# Altium PCB PCB.PcbDoc
Units mil, origin at the board's own origin, x right, y up, seen from the top; angles counter-clockwise.
Board outline 2559.06 x 2098.9 mil, 2 copper layers (Top Layer, Bottom Layer), stack 61.855 mil thick; 19 components, 33 nets, 117 pads, 56 vias.
Unrouted connection lines stored in the file: 2.
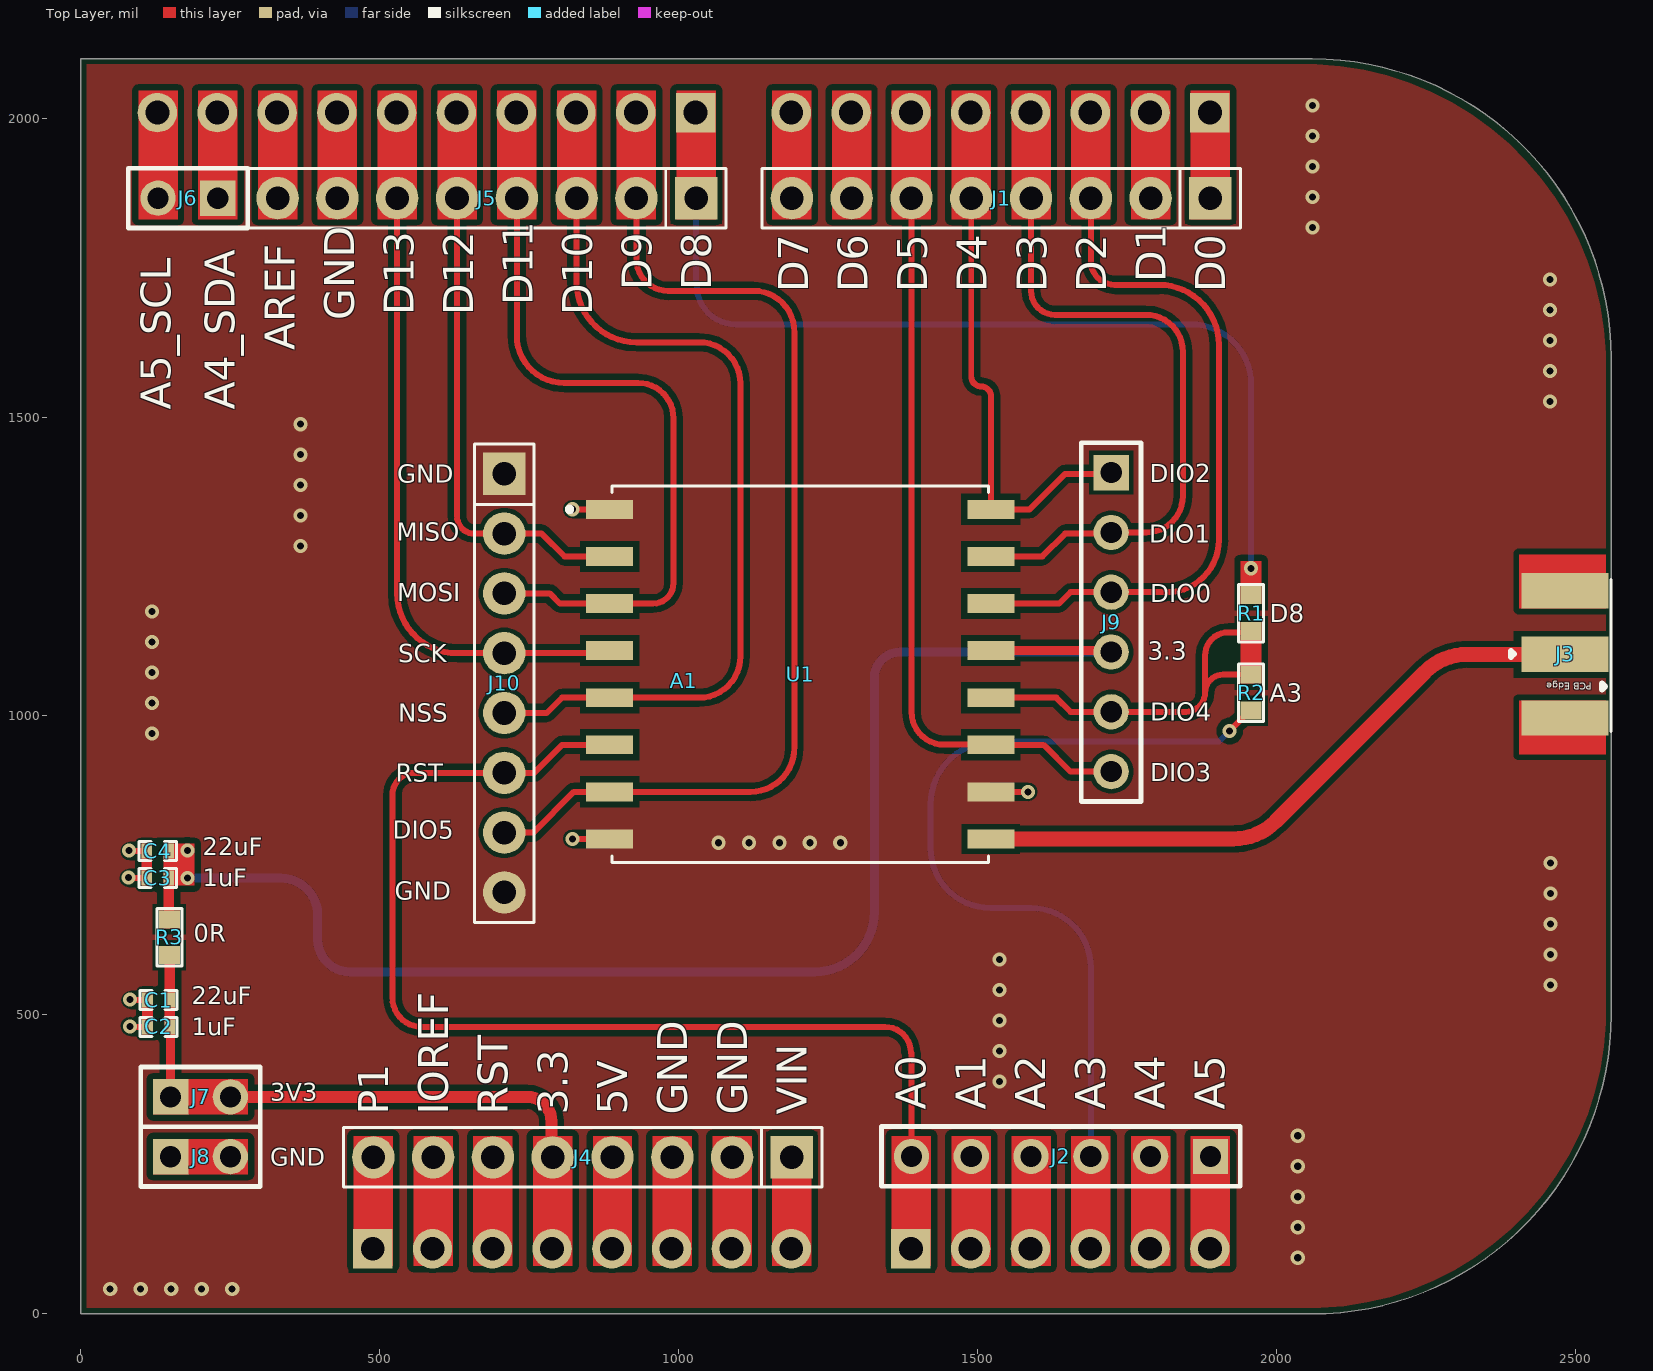
[diagram p0: Top Layer view]
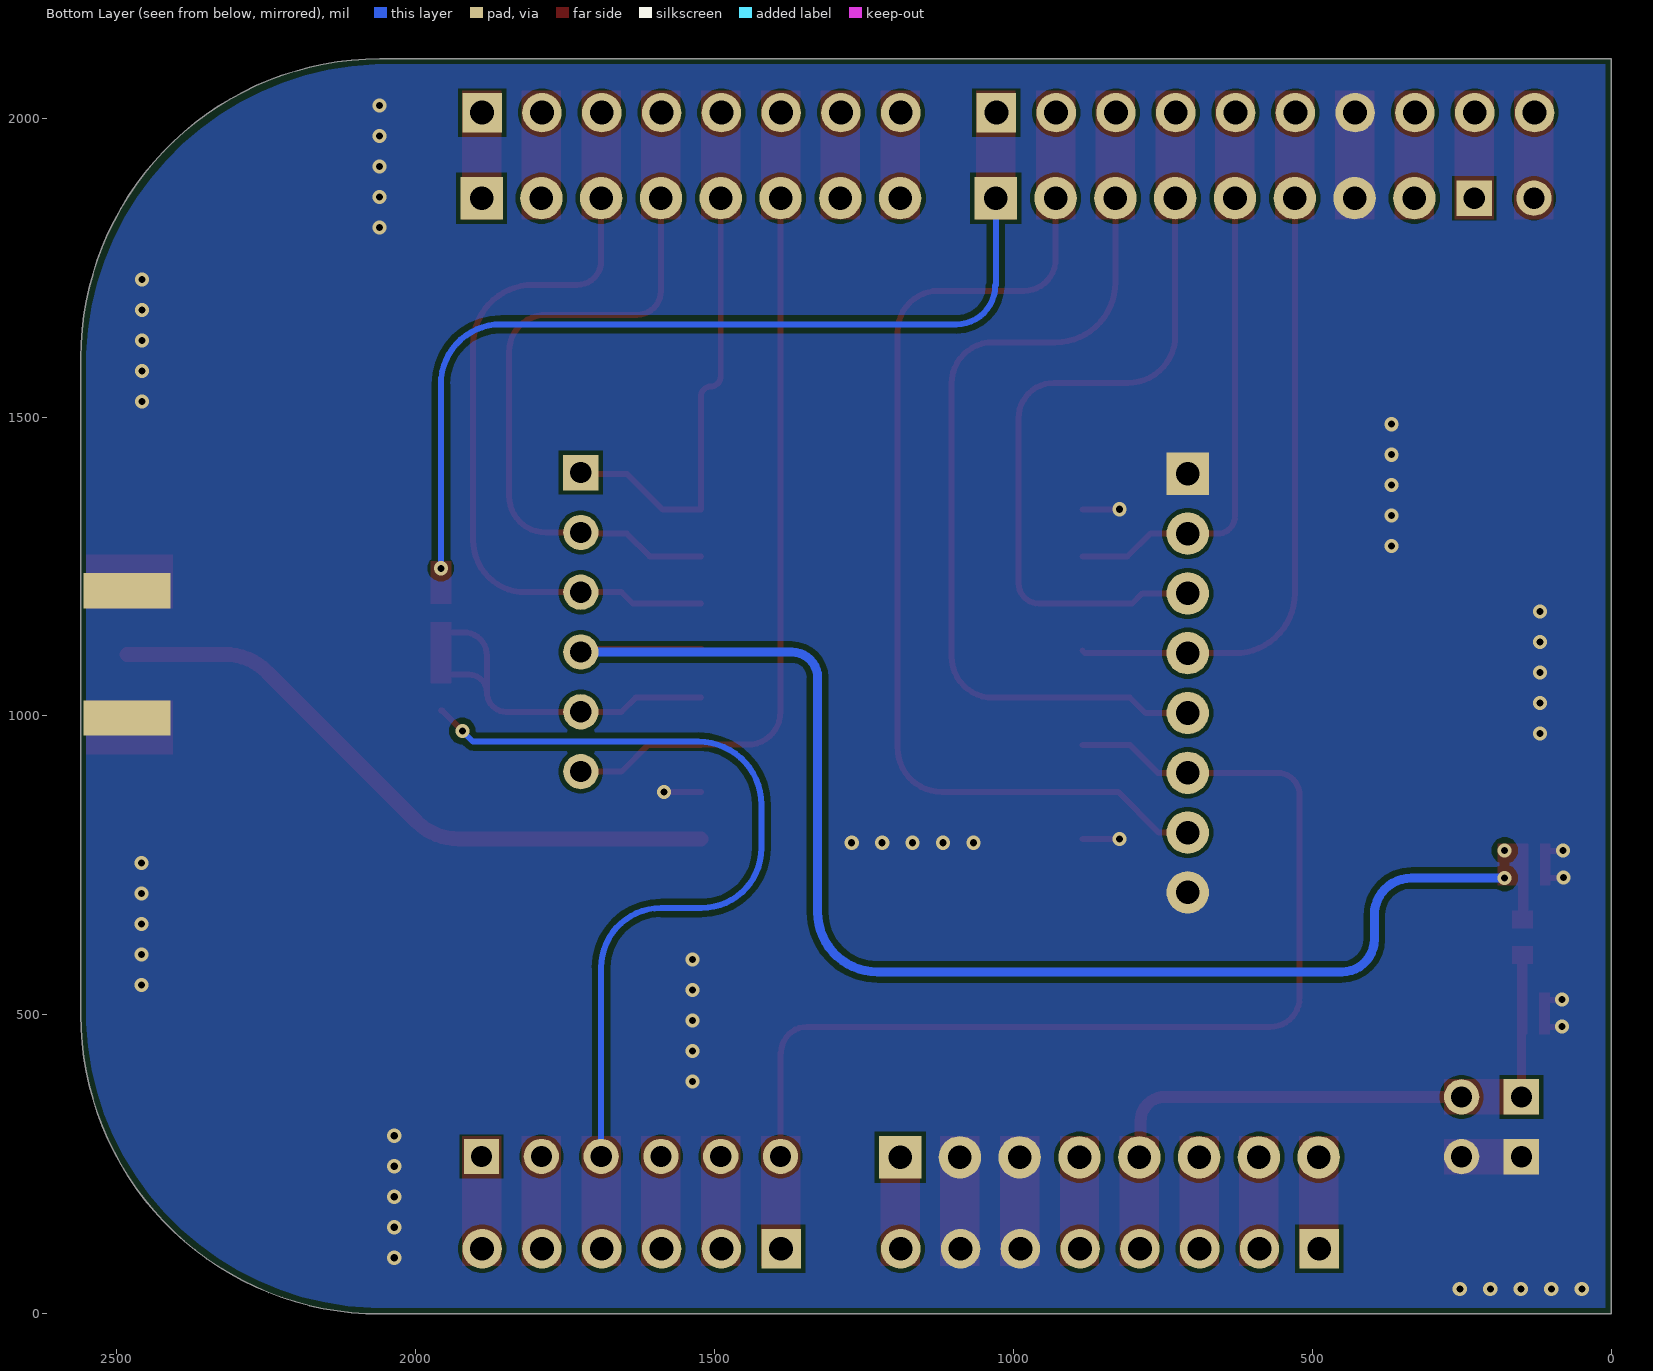
[diagram p1: Bottom Layer view, seen from below]
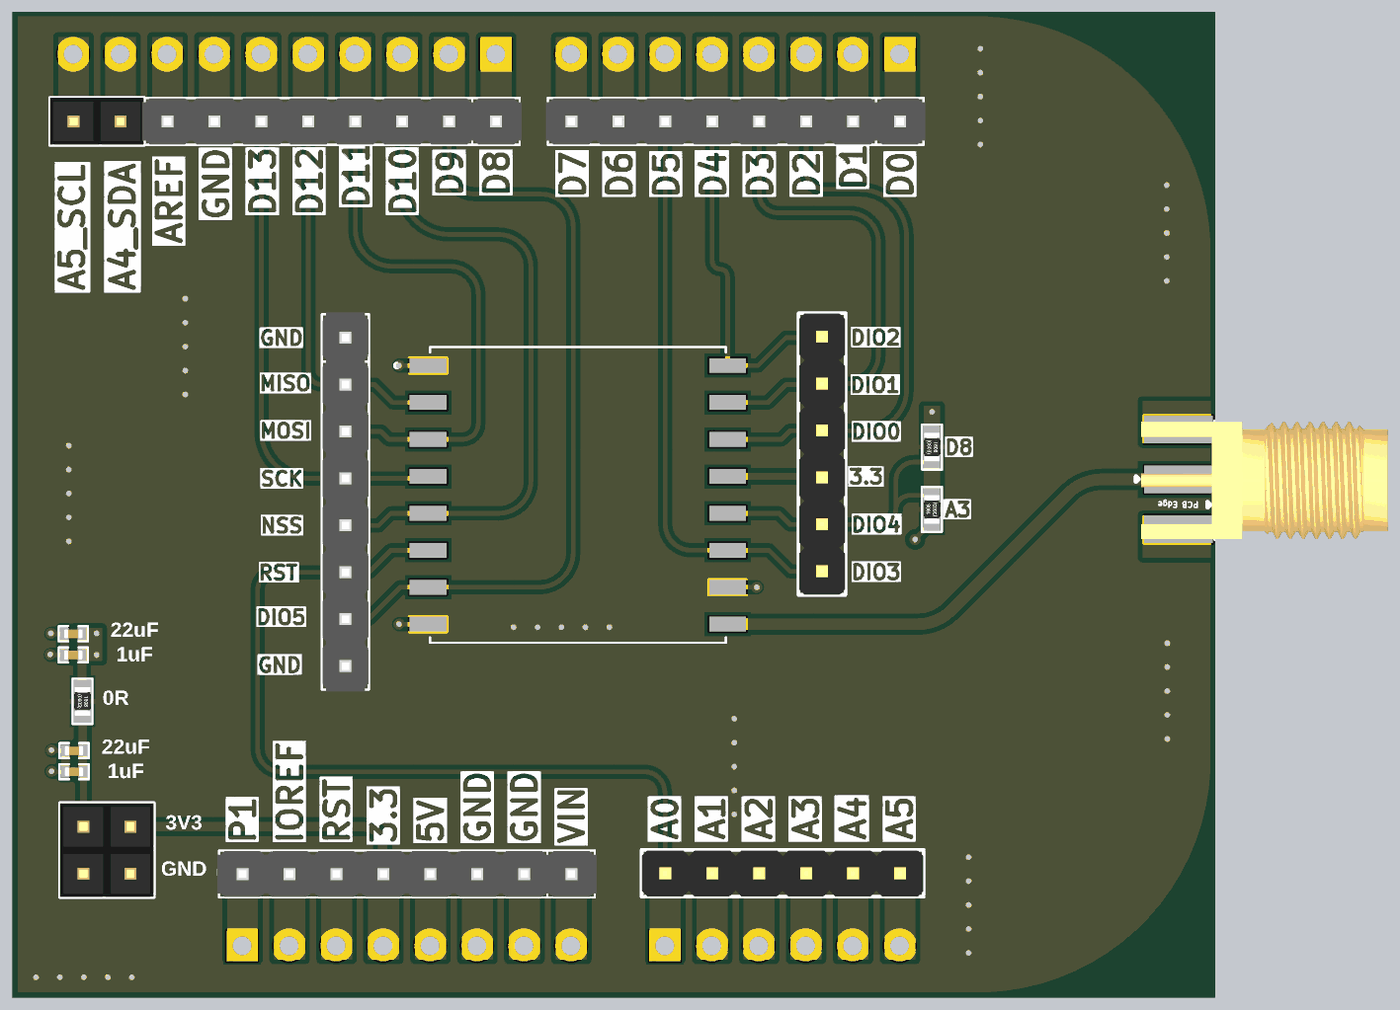
[diagram p2: 3D render of the assembled board from above, using the file's embedded part models]

## Layer stack, top to bottom
Top Solder: solder mask 0.4, Solder Resist, Dk 3.5
Top Layer: signal copper 1.4
Dielectric 1: dielectric 59.0551, FR-4, Dk 4.5
Bottom Layer: signal copper 1.4
Bottom Solder: solder mask 0.4, Solder Resist, Dk 3.5

## Board outline
0,0 0,2098.79 0.11,2098.9 2059.06,2098.9 cw(c2059.06,1598.9) 2559.06,1598.9 2559.06,500 cw(c2059.06,500) 2059.06,0

## Design rules (kind name [scope] priority, off if disabled: settings)
Clearance [All] p1: gap=10 ignorepadtopadclearanceinfootprint=FALSE except(0: SMDPad-Text THPad-Text Via-Text Fill-Text Poly-Text Region-Text Text-Text; 7: SMDPad-Via THPad-Fill THPad-Poly THPad-Region)
MaxMinImpedance "Schematic Impedance Constraint" [InNet('ANT')] p1: minimum=45.00 maximum=55.00
PolygonConnect [All] p1: connectstyle=Direct reliefconductorwidth=10 reliefentries=4 polygonreliefangle="90 Angle" airgapwidth=10
RoutingVias [All] p1: holewidth=11.81 width=23.62 viastyle="Through Hole" minholewidth=11.81 minwidth=23.62 maxholewidth=11.81 maxwidth=23.62
SolderMaskExpansion [All] p1: expansion=4 istentingtop=FALSE
SupplyNets "Schematic Supply Nets_2" [InNet('3V3')] p1: voltage=0.000
SupplyNets "Schematic Supply Nets_1" [InNet('VDD')] p2: voltage=0.000
SupplyNets "Schematic Supply Nets" [InNet('GND')] p3: voltage=0.000
UnRoutedNet [All] p1: checkbadconnections=TRUE
UnpouredPolygon [All] p1: allowunpoured=TRUE
Width [InNetClass('SC50')] p1: maxlimit=24.94 minlimit=24.94 preferedwidth=24.94 impedanceprofiledriven=TRUE impedanceprofileid={687EB5CD-476A-48F2-A53D-EE8B10B04B62} impedanceprofilevalue=50.000000 minimp=50.000000 maximp=50.000000 favimp=50.000000
28 further rules are at their usual default settings.

## Classes and differential pairs
net class SC50: ANT

## Components (designator, comment, footprint, x,y, rotation, side; value= is the part's Value field where it differs from the comment)
A1 "ARDUINO_UNO_REV3" ARDUINO_ARDUINO_UNO_REV3 737.11,1058.18 r0 top
C1 "470nF" Cap-0402 129.97,525.02 r0 top
C2 "22nF" Cap-0402 129.97,480.02 r0 top
C3 "470nF" Cap-0402 128.5,729 r0 top
C4 "22nF" Cap-0402 128.5,774 r0 top
J1 "X6511WV-08H-C60D30" "HDR 1x8 TH male" 1539,1866 r180 top
J2 "X6511WV-06H-C60D30" HDR1X6_ 1889,263.44 r180 top
J3 "SMA Jack" CON-SMA-EDGE_S 2482,1209.3 r180 top
J4 "X6511WV-08H-C60D30" "HDR 1x8 TH male" 839,262 r180 top
J5 "X6511WV-08H-C60D30" "HDR 1x8 TH male" 679,1866 r180 top
J6 "X6511WV-02H-C60D30" HDR1X2_ 229,1866 r180 top
J7 "X6511WV-02H-C60D30" HDR1X2_ 150,363 r0 top
J8 "X6511WV-02H-C60D30" HDR1X2_ 150,263 r0 top
J9 "X6511WV-06H-C60D30" HDR1X6_ 1723,1407 r270 top
J10 "X6511WV-08H-C60D30" "HDR 1x8 TH male" 708,1055 r270 top
R1 "0R" Res-0603 1957,1172 r90 top
R2 "0R" Res-0603 1957.01,1039 r270 top
R3 "0R" Res-0603 148,630 r90 top
U1 "RFM95W-868S2R" MODULE_RFM95W-868S2R 1203,1070 r0 top

## Footprints (in the part's own frame and the unit in brackets; to place one, negate y for a bottom-side part, rotate by r counter-clockwise, add the part's x,y. Pads: shape width x height; smd on the part's side, far side on the other; paste and mask are expansions set on the pad)
ARDUINO_ARDUINO_UNO_REV3 [mil]
  round 66 hole 40: 3V3(50.89,-949.18) 5V(150.89,-949.18) A1(750.89,-949.18) A2(850.89,-949.18) A3(950.89,-949.18) A4(1050.89,-949.18) A4_SDA(-509.11,950.82) A5(1150.89,-949.18) A5_SCL(-609.11,950.82) AREF(-409.11,950.82) D1(1050.89,950.82) D2(950.89,950.82) D3(850.89,950.82) D4(750.89,950.82) D5(650.89,950.82) D6(550.89,950.82) D7(450.89,950.82) D9(190.89,950.82) D10(90.89,950.82) D11(-9.11,950.82) D12(-109.11,950.82) D13(-209.11,950.82) GND_1(350.89,-949.18) GND_2(250.89,-949.18) GND_3(-309.11,950.82) IOREF(-149.11,-949.18) RST(-49.11,-949.18) VIN(450.89,-949.18)
  rect 66x66 / inner round 66 / far side rect 66x66 hole 40: A0(650.89,-949.18) D0(1150.89,950.82) D8(290.89,950.82) P1(-249.11,-949.18)
Cap-0402 [mil]
  rect 18x25 smd mask+2.36: 1(-18.5,0) 2(18.5,0)
  silkscreen extent -31,-16 31,16, body extent -20,-10 20,10, height 19
CON-SMA-EDGE_S [mm]
  rect 3.7x1.5 smd: 1(0,2.7) 2(0,0) 3(0,5.4)
  rect 3.7x1.5 smd far side: 4(0,5.4) 5(0,0)
  silkscreen extent -1.96,-0.48 2.3,5.97, body extent -11.32,-0.42 2.01,5.93, height 3.55
HDR1X2_ [mm] "CONN HEADER VERT 2POS 2.54MM"
  rect 1.5x1.5 hole 0.9: 1(0,0)
  round 1.5 hole 0.9: 2(2.54,0)
  silkscreen extent -1.27,-1.27 3.81,1.27, body extent -1.27,-1.27 3.81,1.27, height 8.44
HDR1X6_ [mm] "Connector; Header; 6 Position"
  rect 1.5x1.5 hole 0.9: 1(0,0)
  round 1.5 hole 0.9: 2(2.54,0) 3(5.08,0) 4(7.62,0) 5(10.16,0) 6(12.7,0)
  silkscreen extent -1.27,-1.27 13.97,1.27, body extent -1.27,-1.24 13.97,1.25, height 8.54
"HDR 1x8 TH male" [mm]
  rect 1.8x1.8 hole 1 paste-2539.97 mask+0.051: 1(-8.89,0)
  round 1.8 hole 1 paste-2539.97 mask+0.051: 2(-6.35,0) 3(-3.81,0) 4(-1.27,0) 5(1.27,0) 6(3.81,0) 7(6.35,0) 8(8.89,0)
  silkscreen extent -10.16,-1.27 10.16,1.27, body extent -10.26,-1.25 10.27,1.25, height 8.5
MODULE_RFM95W-868S2R [mm]
  rect 2x0.8 smd: 1(-8.1,7) 2(-8.1,5) 3(-8.1,3) 4(-8.1,1) 5(-8.1,-1) 6(-8.1,-3) 7(-8.1,-5) 8(-8.1,-7) 9(8.1,-7) 10(8.1,-5) 11(8.1,-3) 12(8.1,-1) 13(8.1,1) 14(8.1,3) 15(8.1,5) 16(8.1,7)
  silkscreen extent -9.9,-8 8,8
Res-0603 [mil]
  rect 30x35 smd: 1(-30,0) 2(30,0)
  silkscreen extent -48,-21 48,21, body extent -31,-17 31,17, height 18

## Part data
A1: "Microcontroller board based on the ATmega328P.", Package="Non-Standard Arduino", Check_prices=https://www.snapeda.com/parts/ARDUINO%20UNO%20REV3/Arduino/view-part/?ref=eda, MF=Arduino, MP="ARDUINO UNO REV3", SnapEDA_Link=https://www.snapeda.com/parts/ARDUINO%20UNO%20REV3/Arduino/view-part/?ref=snap
C1 C3: library part CC0402KRX5R7BB474, "CAP CER 0.47UF 16V X5R 0402", Case/Package=0402, LCSC Part Number=C527010, Manufacturer=Yageo, Max Operating Temperature=85°C, Min Operating Temperature=-55°C, Supplier Part Number 1=1070400, Tolerance=10%, Voltage Rating=16V, Capacitance=470nF, Category="Ceramic Capacitors", ComponentLink1Description=http://www.yageo.com/documents/recent/UPY-GPHC_X5R_4V-to-50V_25.pdf?src-supplier=Digi-Key, ComponentLink1URL=http://www.yageo.com/documents/recent/UPY-GPHC_X5R_4V-to-50V_25.pdf?src-supplier=Digi-Key, ComponentLink2Description=http://www.yageo.com/exep/pages/download/literatures/ProductSelectionGuide%202014_Final_2.pdf?src-supplier=Digi-Key, ComponentLink2URL=http://www.yageo.com/exep/pages/download/literatures/ProductSelectionGuide%202014_Final_2.pdf?src-supplier=Digi-Key, Halogen Free="Halogen Free", Item Type=Capacitor, Lead Free="Lead Free", Length=0.039inch, Manufacturer Part Number=CC0402KRX5R7BB474, Mount="Surface Mount", Packaging="Tape and Reel", Pricing 1="10000=0.01840, 20000=0.01800, 40000=0.01760, 50000=0.01750, 150000=0.01670 (USD)", RoHS=Yes, RoHS Compliant=Yes, Stock 1=10000, Supplier 1="Future Electronics", Thickness=0.022inch, Voltage Rating (DC)=16V, Width=0.02inch
C2 C4: library part CC0402JRX7R7BB223, "CAP CER 0.022UF 16V X7R 0402", Case Code (Imperial)=0402, Case Code (Metric)=1005, Dielectric=X7R, LCSC Part Number=C541459, Manufacturer=Yageo, Max Operating Temperature=125°C, Min Operating Temperature=-55°C, Supplier Part Number=311-3758-1-ND, Tolerance=5%, Voltage Rating=16V, Case/Package=0402, Category="Ceramic Capacitors", ComponentLink1Description=https://datasheet.ciiva.com/13264/upy-gphc-x7r-6-3v-to-50v-8-12304-13264039.pdf?src-supplier=Mouser, ComponentLink1URL=https://datasheet.ciiva.com/13264/upy-gphc-x7r-6-3v-to-50v-8-12304-13264039.pdf?src-supplier=Mouser, Halogen Free=5694HalogenFree, Item Type=Capacitor, Lead Free=5697LeadFree, Length=0.039inch, Manufacturer Part Number=CC0402JRX7R7BB223, Mounting Technology="Surface Mount", Packaging="Tape and Reel", Pricing="1=0.1, 10=0.033, 50=0.0192, 100=0.0149, 500=0.0112, 1000=0.0088, 2500=0.008, 5000=0.00736 (USD)", RoHS=Yes, RoHS Compliant=Yes, Series=CC, Stock=4203, Supplier=Digikey, Termination=SMD/SMT, Thickness=0.022inch, Voltage Rating (DC)=16V, Weight=2.3E-05oz, Width=0.5mm
J1 J4 J5 J10: "Gold 250V 3A Square Pins 2.5mm 8P 260℃ 6mm -40℃~+105℃ 3mm 2.54mm Plugin Black Brass 2.54mm 1x8P Plugin,P=2.54mm Pin Headers ROHS", LCSC Part Number=C706880, Manufacturer=XKB, Package=Plugin,P=2.54mm, ComponentLink1Description=LCSC, ComponentLink1URL=https://www.lcsc.com/product-detail/Pin-Headers_XKB-Connection-X6511WV-08H-C60D30_C706880.html, Item Type="Male Header", Manufacturer Part Number=X6511WV-08H-C60D30
J2 J9: "Gold 250V 3A Straight Square Pins 2.5mm 6P 260℃ 6mm -40℃~+105℃ 3mm 2.54mm Plugin Black Brass 1x6P Plugin,P=2.54mm Pin Headers ROHS", LCSC Part Number=C706878, Manufacturer=XKB, Package=Plugin,P=2.54mm, ComponentLink1Description=LCSC, ComponentLink1URL=https://www.lcsc.com/product-detail/Pin-Headers_XKB-Connectivity-X6511WV-06H-C60D30_C706878.html, Item Type="Male Header", Manufacturer Part Number=X6511WV-06H-C60D30
J3: library part CON-SMA-EDGE-S, "Sma Female Connector, Pcb Edge Mount Rohs Compliant: Yes", Case/Package=SMA, Manufacturer="RF Solutions", Package=THT, Supplier Part Number 1=1258191, Category="RF / Coaxial Connectors", ComponentLink1Description=https://media.digikey.com/pdf/Data%20Sheets/RF%20Solutions%20PDFs/CON-SMA-EDGE.pdf?src-supplier=Digi-Key, ComponentLink1URL=https://media.digikey.com/pdf/Data%20Sheets/RF%20Solutions%20PDFs/CON-SMA-EDGE.pdf?src-supplier=Digi-Key, Connector Type=SMA, Fastening Type=Threaded, Item Type=Connector, Manufacturer Part Number=CON-SMA-EDGE-S, Mount=Edge,Board, Number of Ports=1, Pricing 1="1=1.16, 10=0.96 (GBP)", RoHS=Yes, Series=-, Stock 1=4145, Supplier 1=Rs, Termination=Solder
J6 J7 J8: "Gold 250V 3A Straight Square Pins 2.5mm 2P 260℃ 6mm -40℃~+105℃ 3mm 2.54mm Plugin Black Brass 1x2P Plugin,P=2.54mm Pin Headers ROHS", LCSC Part Number=C706874, Manufacturer=XKB, Package=Plugin,P=2.54mm, ComponentLink1Description=LCSC, ComponentLink1URL=https://www.lcsc.com/product-detail/Pin-Headers_XKB-Connectivity-X6511WV-02H-C60D30_C706874.html, Item Type="Male Header", Manufacturer Part Number=X6511WV-02H-C60D30
R1 R2 R3: library part RC0603FR-070RL, "RES SMD 0R, 1%, 0.1W, 0603", LCSC Part Number=C100044, Manufacturer=Yageo, Package=0603, ComponentLink9Description=LCSC, ComponentLink9URL=https://www.lcsc.com/product-detail/Chip-Resistor-Surface-Mount_YAGEO-RC0603FR-070RL_C100044.html, Item Type=Resistor, Manufacturer Part Number=RC0603FR-070RL
U1: "Module: transceiver; RF; FSK,GFSK,GMSK,LoRa,MSK,OOK; 868MHz; SMD", Package=None, Check_prices=https://www.snapeda.com/parts/RFM95W-868S2R/HOPE+Microelectronics/view-part/?ref=eda, MF="Hope Microelectronics", MP=RFM95W-868S2R, SnapEDA_Link=https://www.snapeda.com/parts/RFM95W-868S2R/HOPE+Microelectronics/view-part/?ref=snap

## Via types
v1: diameter 23.62, hole 11.81, Top Layer to Bottom Layer, 56 vias

## Nets (pads, with @x,y where several pads share a name; then routed paths per layer and width w, separated by ;. In a path a pad name is that pad's centre, name@x,y a point inside that pad or via, vN(x,y) a via of type N, cw(c..) or ccw(c..) an arc to the next point about the centre after c; other vN are vias at no path point)
3V3: C3.2 C4.2 J9.4 R3.2 U1.13 | length 2328.7
  Top Layer w15: U1.13 1718.63,1109.37 J9.4@1723,1105
  Bottom Layer w15: v1(178,729) 334,729 cw(c334,667) 396,667 396,626.2 ccw(c450.2,626.2) 450.2,572 1227,572 ccw(c1227,672) 1327,672 1327,1064 cw(c1370,1064) 1370,1107 J9.4
  other v1: 178,774.98
+5V: A1.5V J4.4
A0: A1.A0 J2.6 J10.6 U1.6 | length 1836.3
  Top Layer w10: U1.6 804.83,951.89 757.94,905 J10.6 558,905 ccw(c558,868) 521,868 521,529 ccw(c570,529) 570,480 1345,480 cw(c1345,437) 1388,437 cw(c1388,436) 1389,436 J2.6
A1: A1.A1 J2.5
A2: A1.A2 J2.4
A3: A1.A3 J2.3 R2.2 | length 1388.6
  Top Layer w10: v1(1921.11,974.91) 1921.11,975.6 1954.51,1009 R2.2
  Bottom Layer w10: J2.3 1689,579 ccw(c1589,579) 1589,679 1521,679 cw(c1521,779) 1421,779 1421,851.89 cw(c1526.15,851.89) 1526.15,957.04 1903.24,957.04 v1(1921.11,974.91)
A4: A1.A4 J2.2
A4_SDA: A1.A4_SDA J6.1
A5: A1.A5 J2.1
A5_SCL: A1.A5_SCL J6.2
ANT: J3.1 U1.9 | length 1079.3
  Top Layer w24.94: U1.9 1926.99,794.41 ccw(c1926.99,894.41) 1997.7,823.7 2247.71,1073.71 cw(c2318.42,1003) 2318.42,1103 J3.1
AREF: A1.AREF J5.8
D0: A1.D0 J1.1
D1: A1.D1 J1.2
D2: A1.D2 J1.3 J9.3 U1.14 | length 1164.5
  Top Layer w10: U1.14 1636.11,1188.11 1655,1207 J9.3 1816,1207 ccw(c1816,1294) 1903,1294 1903,1621 ccw(c1803,1621) 1803,1721 1729,1721 cw(c1729,1761) 1689,1761 J1.3
D3: A1.D3 J1.4 J9.2 U1.15 | length 1079.9
  Top Layer w10: U1.15 1607.85,1266.85 1646,1305 J9.2@1723,1305 ; J1.4 1589,1711 ccw(c1629,1711) 1629,1671 1781,1671 cw(c1781,1609) 1843,1609 1843,1368 cw(c1782,1368) 1782,1307 J9.2
D4: A1.D4 J1.5 J9.1 U1.16 | length 764.9
  Top Layer w10: J1.5 1489,1568 ccw(c1506,1568) 1506,1551 cw(c1506,1535.1) 1521.9,1535.1 U1.16 1586.59,1345.59 1646,1405 J9.1@1723,1405
D5: A1.D5 J1.6 J9.6 U1.11 | length 1243.1
  Top Layer w10: J1.6 1389,1007 ccw(c1444,1007) 1444,952 1521.9,952 U1.11 1610.11,951.89 1655,907 J9.6
D6: A1.D6 J1.7
D7: A1.D7 J1.8
D8: A1.D8 J5.1 R1.2 | length 1475.8
  Bottom Layer w10: J5.1 1029,1721 ccw(c1030,1721) 1030,1720 ccw(c1095,1720) 1095,1655 1857,1655 cw(c1857,1555) 1957,1555 v1(1957,1247)
D9: A1.D9 J5.2 J10.7 U1.7 | length 1686.8
  Top Layer w10: J10.7 756.23,805 824.38,873.15 U1.7 1120,873.15 ccw(c1120,946.15) 1193,946.15 1193,1643 ccw(c1125,1643) 1125,1711 982,1711 cw(c982,1764) 929,1764 J5.2
D10: A1.D10 J5.3 J10.5 U1.5 | length 1412.8
  Top Layer w10: J10.5 779,1005 804.63,1030.63 U1.5 1034,1030.63 ccw(c1034,1099.63) 1103,1099.63 1103,1556 ccw(c1034,1556) 1034,1625 929,1625 cw(c929,1725) 829,1725 J5.3
D11: A1.D11 J5.4 J10.3 U1.3 | length 1156.1
  Top Layer w10: J10.3 784,1205 800.89,1188.11 U1.3 957,1188.11 ccw(c957,1222.11) 991,1222.11 991,1498 ccw(c932,1498) 932,1557 808,1557 cw(c808,1636) 729,1636 J5.4
D12: A1.D12 J5.5 J10.2 U1.2 | length 819.5
  Top Layer w10: J5.5 629,1334 ccw(c658,1334) 658,1305 J10.2 770.6,1305 808.75,1266.85 U1.2
D13: A1.D13 J5.6 J10.4 U1.4 | length 1075
  Top Layer w10: J5.6 529,1205 ccw(c629,1205) 629,1105 J10.4 879.73,1105 U1.4
DIO4: J9.5 R1.1 R2.1 U1.12 | length 642.7
  Top Layer w10: U1.12 1631.37,1030.63 1655,1007 J9.5 1848,1007 ccw(c1848,1039) 1880,1039 ; R2.1 1910,1069 ccw(c1910,1039) 1880,1039 ; R1.1 cw(c1955,1142) 1955,1140 1919,1140 ccw(c1919,1101) 1880,1101 1880,1039
GND: A1.GND_1 A1.GND_2 A1.GND_3 C1.1 C2.1 C3.1 C4.1 J3.2 J3.3 J3.4 J3.5 J4.2 J4.3 J5.7 J8.1 J8.2 J10.1 J10.8 U1.1 U1.8 U1.10 | length 302
  Top Layer w10: v1@80.34,729.01 C3.1@108.82,729.01 ; v1@81.51,774 C4.1 ; v1(82,481) ccw(c82.98,481) 82.98,480.02 C2.1 ; v1@82.98,525.02 C1.1 ; v1@822,794.41 U1.8 ; v1@822,1345.59 U1.1 ; U1.10 1584,873.15 v1(1584,873)
  other v1: 49,42 100,42 151,42 202,42 253,42 2035,94 2035,145 2035,196 2035,247 2035,298 1536,389 1536,440 1536,491 82,526 1536,542 2458,550 1536,593 2458,601 2458,652 2458,703 79.35,729.99 2458,754 80.53,774.98 1066,788 1117,788 1168,788 1219,788 1270,788 822,794.56 119,971 119,1022 119,1073 119,1124 119,1175 367,1284 367,1335 822,1345.74 367,1386 367,1437 367,1488 2457,1526 2457,1577 2457,1628 2457,1679 2457,1730 2060,1816.79 2060,1867.79 2060,1918.79 2060,1969.79 2060,2020.79
IOREF: A1.IOREF J4.7
P1: A1.P1 J4.8
RST: A1.RST J4.6
VDD: A1.3V3 C1.2 C2.2 J4.5 J7.1 J7.2 R3.1 | length 737
  Top Layer w15: J7.1 C2.2@150,478.49
  Top Layer w20: J7.2 746,363 cw(c746,322) 787,322 787,264 ccw(c789,264) J4.5
VIN: A1.VIN J4.1

## Polygon pours and split planes (outlines as drawn)
GND on Bottom Layer "NONET_L-01_P-001" (solid, pour order 0): 2047,2090 cw(c2047,1587) 2550,1587 2550,506 cw(c2054,506) 2054,10 10,10 10,2090
GND on Top Layer "NONET_L-01_P-001" (solid, pour order 2): 2047,2090 cw(c2047,1587) 2550,1587 2550,506 cw(c2054,506) 2054,10 10,10 10,2090

## Other copper
Top Layer:
  rectangle net D13: 496,1830.57 562,2046
  rectangle net D3: 1556,1830.57 1622,2046
  rectangle net A0: 1356,80 1422,297.43
  rectangle net D8: 996,1830.57 1062,2046
  rectangle net D8: 1939.5,1187 1974.5,1259.54
  rectangle net D12: 596,1830.57 662,2046
  rectangle net D2: 1656,1830.57 1722,2046
  rectangle net DIO4: 1939.5,1054 1974.51,1157
  rectangle net A1: 1456,80 1522,297.43
  rectangle net A2: 1556,80 1622,297.43
  rectangle net A4: 1756,80 1822,297.43
  rectangle net D0: 1856,1830.57 1922,2046
  rectangle net D7: 1156,1830.57 1222,2046
  rectangle net A5: 1856,80 1922,297.43
  rectangle net A3: 1656,80 1722,297.43
  rectangle net P1: 456,80 522,297.43
  rectangle net GND: 2405.23,936 2550.9,1026.23
  rectangle net GND: 2405.23,1179.77 2550.9,1270
  rectangle net 3V3: 138,716.5 190,786.5
  rectangle net A5_SCL: 96,1830.57 162,2046
  rectangle net A4_SDA: 196,1830.57 262,2046
  rectangle net AREF: 296,1830.57 362,2046
  rectangle net GND: 396,1830.57 462,2046
  rectangle net D11: 696,1830.57 762,2046
  rectangle net D10: 796,1830.57 862,2046
  rectangle net D9: 896,1830.57 962,2046
  rectangle net D6: 1256,1830.57 1322,2046
  rectangle net D5: 1356,1830.57 1422,2046
  rectangle net D4: 1456,1830.57 1522,2046
  rectangle net D1: 1756,1830.57 1822,2046
  rectangle net VIN: 1156,80 1222,297.43
  rectangle net GND: 1056,80 1122,297.43
  rectangle net GND: 956,80 1022,297.43
  rectangle net +5V: 856,80 922,297.43
  rectangle net VDD: 756,80 822,297.43
  rectangle net RST: 656,80 722,297.43
  rectangle net IOREF: 556,80 622,297.43
  rectangle net GND: 102.47,467.52 120.47,537.52
  rectangle net GND: 101,716.5 119,786.5
  rectangle net 3V3: 130.5,645 165.5,675
  rectangle net 3V3: 138,660 156,786.5
  rectangle net VDD: 130.5,585 165.5,615
  rectangle net VDD: 139.47,467.52 157.47,600
  rectangle net GND: 120.47,233.47 279.53,292.53
  rectangle net VDD: 120.47,333.47 279.53,392.53

## Silkscreen, mask and mechanical layers (free items; w line width, h text height)
Top Overlay:
  text "D1" at 1814.32,1725.36 h50 r90
  text "D9" at 954.45,1711.7 h50 r90
  text "D8" at 1053.99,1711.7 h50 r90
  text "D7" at 1216.31,1708.7 h50 r90
  text "D6" at 1315.98,1708.7 h50 r90
  text "D5" at 1415.64,1708.7 h50 r90
  text "D4" at 1515.31,1708.7 h50 r90
  text "D3" at 1614.98,1708.7 h50 r90
  text "D2" at 1714.65,1708.7 h50 r90
  text "D0" at 1913.99,1708.7 h50 r90
  text "D11" at 755.38,1686.71 h50 r90
  text "D13" at 556.31,1670.05 h50 r90
  text "D12" at 655.84,1670.05 h50 r90
  text "D10" at 854.92,1670.05 h50 r90
  text "GND" at 456.77,1661.72 h50 r90
  text "AREF" at 357.23,1611.73 h50 r90
  text "A5_SCL" at 149.83,1511.77 h50 r90
  text "A4_SDA" at 257.7,1511.77 h50 r90
  text "DIO2" at 1787.51,1390.69 h30
  text "GND" at 529.01,1390 h30
  text "MISO" at 528.52,1293 h30
  text "DIO1" at 1786.6,1289.53 h30
  text "MOSI" at 529.45,1192.08 h30
  text "DIO0" at 1788.51,1190 h30
  text "D8" at 1988.01,1157 h30
  text "3.3" at 1784.2,1094.38 h30
  text "SCK" at 531.01,1090 h30
  text "A3" at 1988.01,1024.01 h30
  text "DIO4" at 1788.51,992 h30
  text "NSS" at 531.01,990 h30
  text "DIO3" at 1788.51,891 h30
  text "RST" at 526.41,889.94 h30
  text "DIO5" at 521.58,794.85 h30
  text "22uF" at 204,756.99 h50
  text "1uF" at 204,705 h50
  text "GND" at 524.87,692.86 h30
  text "0R" at 189,612 h50
  text "22uF" at 185.34,508.02 h50
  text "1uF" at 185.34,456.02 h50
  text "3V3" at 316.55,346.41 h50
  text "A0" at 1412.99,341.35 h50 r90
  text "A1" at 1512.99,341.35 h50 r90
  text "A2" at 1612.99,341.35 h50 r90
  text "A3" at 1712.99,341.35 h50 r90
  text "A4" at 1812.99,341.35 h50 r90
  text "A5" at 1912.99,341.35 h50 r90
  text "P1" at 513.99,333.35 h50 r90
  text "IOREF" at 613.99,333.36 h50 r90
  text "RST" at 713.99,333.36 h50 r90
  text "3.3" at 813.99,333.36 h50 r90
  text "5V" at 913.99,333.35 h50 r90
  text "GND" at 1013.99,333.35 h50 r90
  text "GND" at 1113.99,333.36 h50 r90
  text "VIN" at 1213.99,333.36 h50 r90
  text "GND" at 316.55,238 h50
Board Outline:
  the board outline again, w10
Fabrication:
  drawing of 191 lines, arcs and shapes, not listed
  text "Layer" at 95.34,3079 h60
  text "Name" at 505.26,3079 h60
  text "Material" at 1435,3079 h60
  text "Thickness" at 2294.77,3079 h60
  text "Constant" at 2944.6,3079 h60
  text "Board Layer Stack" at 3514.46,3079 h60
  text "Top Overlay" at 505.26,2959 h60
  text "Top Solder" at 505.26,2839 h60
  text "Solder Resist" at 1435,2839 h60
  text "0.40mil" at 2294.77,2839 h60
  text "3.5" at 2944.6,2839 h60
  text "1" at 95.34,2719 h60
  text "Top Layer" at 505.26,2719 h60
  text "1.40mil" at 2294.77,2719 h60
  text "Dielectric 1" at 505.26,2599 h60
  text "FR-4" at 1435,2599 h60
  text "59.06mil" at 2294.77,2599 h60
  text "4.5" at 2944.6,2599 h60
  text "2" at 95.34,2479 h60
  text "Bottom Layer" at 505.26,2479 h60
  text "1.40mil" at 2294.77,2479 h60
  text "Bottom Solder" at 505.26,2359 h60
  text "Solder Resist" at 1435,2359 h60
  text "0.40mil" at 2294.77,2359 h60
  text "3.5" at 2944.6,2359 h60
  text "Bottom Overlay" at 505.26,2239 h60
Drill Drawing:
  circle w10: c3256.62,1251.83 r33.33
  lines w10: 3223.29,985.17 3289.96,985.17 3256.62,918.5 3223.29,985.17 ; 3223.29,1068.5 3289.96,1068.5 3289.96,1135.17 3223.29,1135.17 3223.29,1068.5 ; 3223.29,1368.5 3256.62,1385.17 3289.96,1368.5 3273.29,1401.83 3289.96,1435.17 3256.62,1418.5 3223.29,1435.17 3239.96,1401.83 3223.29,1368.5
  lines w15: 3163.5,873.5 10173.6,873.5 ; 3163.5,1473.5 10173.6,1473.5 ; 3714.38,723.5 3714.38,1623.5 ; 4304.22,723.5 4304.22,1623.5 ; 5403.9,723.5 5403.9,1623.5 ; 5909.78,723.5 5909.78,1623.5 ; 6643.58,723.5 6643.58,1623.5 ; 8143.13,723.5 8143.13,1623.5 ; 8732.98,723.5 8732.98,1623.5 ; 9478.78,723.5 9478.78,1623.5 ; 3163.5,723.5 10173.6,723.5 10173.6,1623.5 3163.5,1623.5 3163.5,723.5
  text "Symbol" at 3253.5,1518.5 h72
  text "Count" at 3759.38,1518.5 h72
  text "Hole Size" at 4349.22,1518.5 h72
  text "Plated" at 5448.9,1518.5 h72
  text "Hole Type" at 5954.78,1518.5 h72
  text "Drill Layer Pair" at 6688.58,1518.5 h72
  text "Via/Pad" at 8188.13,1518.5 h72
  text "Pad Shape" at 8777.98,1518.5 h72
  text "Template" at 9523.78,1518.5 h72
  text "56" at 3759.38,1368.5 h60
  text "11.81mil (0.300mm)" at 4349.22,1368.5 h60
  text "PTH" at 5448.9,1368.5 h60
  text "Round" at 5954.78,1368.5 h60
  text "Top Layer - Bottom Layer" at 6688.58,1368.5 h60
  text "Via" at 8188.13,1368.5 h60
  text "Rounded" at 8777.98,1368.5 h60
  text "v60h30m60" at 9523.78,1368.5 h60
  text "18" at 3759.38,1218.5 h60
  text "35.43mil (0.900mm)" at 4349.22,1218.5 h60
  text "PTH" at 5448.9,1218.5 h60
  text "Round" at 5954.78,1218.5 h60
  text "Top Layer - Bottom Layer" at 6688.58,1218.5 h60
  text "Pad" at 8188.13,1218.5 h60
  text "(Mixed)" at 8777.98,1218.5 h60
  text "(Mixed)" at 9523.78,1218.5 h60
  text "32" at 3759.38,1068.5 h60
  text "39.37mil (1.000mm)" at 4349.22,1068.5 h60
  text "PTH" at 5448.9,1068.5 h60
  text "Round" at 5954.78,1068.5 h60
  text "Top Layer - Bottom Layer" at 6688.58,1068.5 h60
  text "Pad" at 8188.13,1068.5 h60
  text "(Mixed)" at 8777.98,1068.5 h60
  text "(Mixed)" at 9523.78,1068.5 h60
  text "32" at 3759.38,918.5 h60
  text "40.00mil (1.016mm)" at 4349.22,918.5 h60
  text "PTH" at 5448.9,918.5 h60
  text "Round" at 5954.78,918.5 h60
  text "Top Layer - Bottom Layer" at 6688.58,918.5 h60
  text "Pad" at 8188.13,918.5 h60
  text "Rounded" at 8777.98,918.5 h60
  text "(Mixed)" at 9523.78,918.5 h60
  text "138 Total" at 3759.38,768.5 h60

## Text inside footprints (layer, text, board x,y; h text height)
J3: Top Overlay "PCB Edge" at 2527.06,1055.43 h11.81 r180